# EAGLE board CT_schematic (EAGLE 7.6.0)

Size 100 x 80 mm. Coordinates in mm from the lower left corner, seen from the top.
Outline: 0,0 100,0 100,80 0,80 0,0
Copper layers (1*16): Top 0.035mm / dielectric 1.5mm / Bottom 0.035mm
Design rules "default": minimum track width 10mil, minimum drill 24mil, track to track 8mil, track to pad 8mil, pad to pad 8mil, via to via 8mil, smd to smd 8mil, copper to edge 40mil, drill to drill 8mil, minimum pad ring 10mil, minimum via ring 8mil, stop-mask expansion 4mil, vias tented up to drill 0mil, thermal gap 10mil

## Footprints (pad centres in the part's own frame; a part is rotated, then mirrored left to right if it is on the bottom)
C0603 = smd 0.8 x 0.8: 1 -0.762,0; 2 0.762,0
C0402 = smd 0.5 x 0.5: 1 -0.508,0; 2 0.508,0
C1210 = smd 1.2 x 2.5: 1 -1.524,0; 2 1.524,0
C1206 = smd 1.3 x 1.6: 1 -1.524,0; 2 1.524,0
R0603 = smd 0.8 x 0.8: 1 -0.762,0; 2 0.762,0
TSSOP14 = smd 0.35 x 1: 1 -1.95,-2.825; 2 -1.3,-2.825; 3 -0.65,-2.825; 4 0,-2.825; 5 0.65,-2.825; 6 1.3,-2.825; 7 1.95,-2.825; 8 1.95,2.825; 9 1.3,2.825; 10 0.65,2.825; 11 0,2.825; 12 -0.65,2.825; 13 -1.3,2.825; 14 -1.95,2.825
SAMTEC_FTSH-105-01-L-DV-K = smd 0.762 x 2.794: 1 -2.54,-2.032; 2 -2.54,2.032; 3 -1.27,-2.032; 4 -1.27,2.032; 5 0,-2.032; 6 0,2.032; 7 1.27,-2.032; 8 1.27,2.032; 9 2.54,-2.032; 10 2.54,2.032
SOIC-8 = smd 1.6 x 0.6: 1 -2.7,1.905 | smd 1.55 x 0.6: 2 -2.7,0.635; 3 -2.7,-0.635; 4 -2.7,-1.905; 5 2.7,-1.905; 6 2.7,-0.635; 7 2.7,0.635; 8 2.7,1.905
ASEK = smd 1.4 x 1: 1 -1.1,-0.8; 2 1.1,-0.8; 3 1.1,0.8; 4 -1.1,0.8
ASFL1 = smd 1.7 x 1.5: 1 -1.27,-1.1; 2 1.27,-1.1; 3 1.27,1.1; 4 -1.27,1.1
SOIC-8_EP = smd 1.6 x 0.533: 1 -2.921,1.905; 2 -2.921,0.635; 3 -2.921,-0.635; 4 -2.921,-1.905; 5 2.921,-1.905; 6 2.921,-0.635; 7 2.921,0.635; 8 2.921,1.905 | smd 2.54 x 3.302: EPAD 0,0 | drill 0.406 pad 0.406: P$1 -0.508,0.635; P$2 0.381,0.635; P$3 -0.508,-0.635; P$4 0.381,-0.635
DFN8_2X3MC = smd 0.813 x 0.305: 1 -1.398,0.75; 2 -1.398,0.25; 3 -1.398,-0.25; 4 -1.398,-0.75; 5 1.398,-0.75; 6 1.398,-0.25; 7 1.398,0.25; 8 1.398,0.75 | smd 1.753 x 1.549: 9 0,0
JST-2-SMD = smd 1 x 4.6: 1 -1,-3.7; 2 1,-3.7 | smd 1.6 x 3.4: NC1 -3.4,1.5; NC2 3.4,1.5
FCI_10118193-0001LF = smd 0.4 x 1.35: 1 -1.3,2.675; 2 -0.65,2.675; 3 0,2.675; 4 0.65,2.675; 5 1.3,2.675 | smd 1.6 x 1.4: 6 -3.2,2.45; 7 3.2,2.45 | smd 1.9 x 1.9: 8 -1.2,0; 9 1.2,0 | hole 0.5: -3.3,0; 3.3,0
SON-6 = smd 0.55 x 0.3: 1 -0.355,0.5 | smd 0.52 x 0.3: 2 -0.37,0; 3 -0.37,-0.5; 4 0.37,-0.5; 5 0.37,0; 6 0.37,0.5
SW_4-1437565-2 = smd 1.4 x 2.1: 1 -2.23,4.55; 2 -2.23,-4.55; 3 2.23,4.55; 4 2.23,-4.55
LGM67K-G1J2-24-Z = smd 0.8 x 1.4: A -2,0; C 0,0
NC7SZ125M5X = smd 1.3 x 0.7: 1 -1.3,0.95; 2 -1.3,0; 3 -1.3,-0.95; 4 1.3,-0.95; 5 1.3,0.95

## Placement (x,y rotation side)
C1  1e-07  [C0603]  -43.18,49.53 0 top  (outside the outline)
C2  1e-07  [C0603]  -46.99,49.53 0 top  (outside the outline)
C3  1e-07  [C0603]  -50.8,49.53 0 top  (outside the outline)
C4  1e-07  [C0603]  -54.61,49.53 0 top  (outside the outline)
C5  4.7e-06  [C0603]  -39.37,49.53 0 top  (outside the outline)
C6  1e-07  [C0402]  -41.91,54.61 0 top  (outside the outline)
C7  1e-08  [C0402]  -45.72,54.61 0 top  (outside the outline)
C8  1e-08  [C0402]  -49.53,54.61 0 top  (outside the outline)
C9  1e-08  [C0402]  -53.34,54.61 0 top  (outside the outline)
C10  1e-05  [C1210]  -29.21,38.1 0 top  (outside the outline)
C11  1e-05  [C1210]  -35.56,38.1 0 top  (outside the outline)
C12  1e-05  [C1210]  -41.91,38.1 0 top  (outside the outline)
C13  1e-05  [C1210]  -48.26,38.1 0 top  (outside the outline)
C14  1e-07  [C0402]  -57.15,54.61 0 top  (outside the outline)
C15  1e-05  [C1206]  -54.61,38.1 0 top  (outside the outline)
C16  1e-05  [C1206]  -60.96,38.1 0 top  (outside the outline)
C17  1e-08  [C0402]  -60.96,54.61 0 top  (outside the outline)
C18  1e-08  [C0402]  -15.24,59.69 0 top  (outside the outline)
R1  10000.0  [R0603]  -46.99,44.45 0 top  (outside the outline)
R2  1000.0  [R0603]  -58.42,49.53 0 top  (outside the outline)
R3  1600.5  [R0603]  -62.23,49.53 0 top  (outside the outline)
R4  4700.0  [R0603]  -15.24,54.61 0 top  (outside the outline)
R5  2200.0  [R0603]  -19.05,54.61 0 top  (outside the outline)
R6  2200.0  [R0603]  -22.86,54.61 0 top  (outside the outline)
R7  10000.0  [R0603]  -52.07,44.45 0 top  (outside the outline)
R8  10000.0  [R0603]  -57.15,44.45 0 top  (outside the outline)
R9  10000.0  [R0603]  -62.23,44.45 0 top  (outside the outline)
R10  10000.0  [R0603]  -15.24,49.53 0 top  (outside the outline)
R11  5.0  [R0603]  -26.67,54.61 0 top  (outside the outline)
R12  10000.0  [R0603]  -20.32,49.53 0 top  (outside the outline)
R13  4031.5447154472  [R0603]  -31.75,44.45 0 top  (outside the outline)
R14  2200.0  [R0603]  -30.48,54.61 0 top  (outside the outline)
R15  10000.0  [R0603]  -25.4,49.53 0 top  (outside the outline)
R16  10000.0  [R0603]  -30.48,49.53 0 top  (outside the outline)
R17  9100.0  [R0603]  -34.29,54.61 0 top  (outside the outline)
R18  680000.0  [R0603]  -36.83,44.45 0 top  (outside the outline)
R19  120000.0  [R0603]  -41.91,44.45 0 top  (outside the outline)
R20  2000.0  [R0603]  -38.1,54.61 0 top  (outside the outline)
R21  10000.0  [R0603]  -35.56,49.53 0 top  (outside the outline)
U1  STM32L011D4P7  [TSSOP14]  -27.94,29.21 0 top  (outside the outline)
U2  FTSH-105-01-L-DV-K  [SAMTEC_FTSH-105-01-L-DV-K]  -35.56,7.62 0 top  (outside the outline)
U3  M24M02-DRMN6TP  [SOIC-8]  -40.64,19.05 0 top  (outside the outline)
U4  ASEK-32.768KHz-ECST  [ASEK]  -49.53,30.48 0 top  (outside the outline)
U5  ASFL1-12MHZ-NCS  [ASFL1]  -58.42,19.05 0 top  (outside the outline)
U6  MIC5234YME  [SOIC-8_EP]  -57.15,29.21 0 top  (outside the outline)
U7  MCP73831T-2ACI/MC  [DFN8_2X3MC]  -24.13,58.42 0 top  (outside the outline)
U8  S2B-PH-SM4-TB(LF)(SN)  [JST-2-SMD]  -22.86,21.59 0 top  (outside the outline)
U9  10118193-0001LF  [FCI_10118193-0001LF]  -19.05,29.21 0 top  (outside the outline)
U10  TPS3895ADRYR  [SON-6]  -17.78,58.42 0 top  (outside the outline)
U11  4-1437565-2  [SW_4-1437565-2]  -57.15,6.35 0 top  (outside the outline)
U12  Q65110A2395  [LGM67K-G1J2-24-Z]  -17.78,38.1 0 top  (outside the outline)
U13  nc7sz125m5x  [NC7SZ125M5X]  -15.24,43.18 0 top  (outside the outline)
U14  nc7sz125m5x  [NC7SZ125M5X]  -21.59,43.18 0 top  (outside the outline)

## Library data of the parts
C1-C18 R1-R21 U1-U14 = circuit_tree

## Nets
CLK_U1_2: U1.2 U4.3
CLK_U1_5: U1.5 U5.3
GND: C1.2 C2.2 C3.2 C4.2 C5.2 C6.2 C7.2 C8.2 C9.2 C10.2 C11.2 C12.2 C13.2 C14.2 C15.2 C16.2 C17.2 C18.2 R2.2 R7.2 R11.2 R12.2 R14.2 R17.2 R19.2 R20.2 U1.9 U2.3 U2.5 U3.4 U4.2 U5.2 U6.7 U6.EPAD U7.6 U7.9 U8.2 U9.5 U9.6 U9.7 U9.8 U9.9 U10.2 U12.C U13.2 U13.3 U14.1 U14.3
INPUT_USBPOWER_5V: C15.1 R21.2 U7.1 U7.2 U9.1
NET_U1_1: R7.1 U1.1
NET_U1_4: R4.1 U1.4 U14.4
NET_U1_7: R5.1 U1.7 U3.6
NET_U1_8: R3.1 U1.8 U12.A
NET_U1_11: R1.1 U1.11 U11.3 U11.4
NET_U1_12: R6.1 U1.12 U3.5
NET_U2_9: R11.1 U2.9
NET_U3_3: R12.1 U3.3
NET_U6_4: R13.2 R14.1 U6.4
NET_U7_5: R21.1 U7.5
NET_U7_8: R20.1 U7.8
NET_U10_1: R16.1 R17.1 U10.1
NET_U10_3: R18.2 R19.1 U10.3
NET_U10_4: R15.1 U10.4 U13.4 U14.2
NET_U11_1: R2.1 U11.1 U11.2
PROC_SYS_SWCLK: R9.1 U1.14 U2.4
PROC_SYS_SWDIO: R10.1 U1.13 U2.2
RST_OUT_U2_JTAG_RST_B: R8.1 U2.10 U13.1
VCC_S1_3V7: C10.1 C11.1 C16.1 U6.5 U6.8 U7.3 U7.4 U8.1
VCC_TIER1_3V3: C1.1 C2.1 C3.1 C4.1 C5.1 C6.1 C7.1 C8.1 C9.1 C12.1 C13.1 C14.1 C17.1 C18.1 R1.2 R3.2 R4.2 R5.2 R6.2 R8.2 R9.2 R10.2 R13.1 R15.2 R16.2 R18.1 U1.10 U2.1 U3.8 U4.4 U5.4 U6.1 U10.6 U13.5 U14.5

## Tracks (layer width: path | path; a pad name or v marks a point on that pad's centre or on a via)
CLK_U1_2  (1 unrouted)
CLK_U1_5  (1 unrouted)
GND  (47 unrouted)
INPUT_USBPOWER_5V  (4 unrouted)
NET_U1_1  (1 unrouted)
NET_U1_4  (2 unrouted)
NET_U1_7  (2 unrouted)
NET_U1_8  (2 unrouted)
NET_U1_11  (3 unrouted)
NET_U1_12  (2 unrouted)
NET_U2_9  (1 unrouted)
NET_U3_3  (1 unrouted)
NET_U6_4  (2 unrouted)
NET_U7_5  (1 unrouted)
NET_U7_8  (1 unrouted)
NET_U10_1  (2 unrouted)
NET_U10_3  (2 unrouted)
NET_U10_4  (3 unrouted)
NET_U11_1  (2 unrouted)
PROC_SYS_SWCLK  (2 unrouted)
PROC_SYS_SWDIO  (2 unrouted)
RST_OUT_U2_JTAG_RST_B  (2 unrouted)
VCC_S1_3V7  (7 unrouted)
VCC_TIER1_3V3  (34 unrouted)